# Altium PCB PCB1.PcbDoc
Units mm, origin at the board's own origin, x right, y up, seen from the top; angles counter-clockwise.
Board outline 73.68 x 78.56 mm, 2 copper layers (Top Layer, Bottom Layer); 57 components, 47 nets, 244 pads, 141 vias.
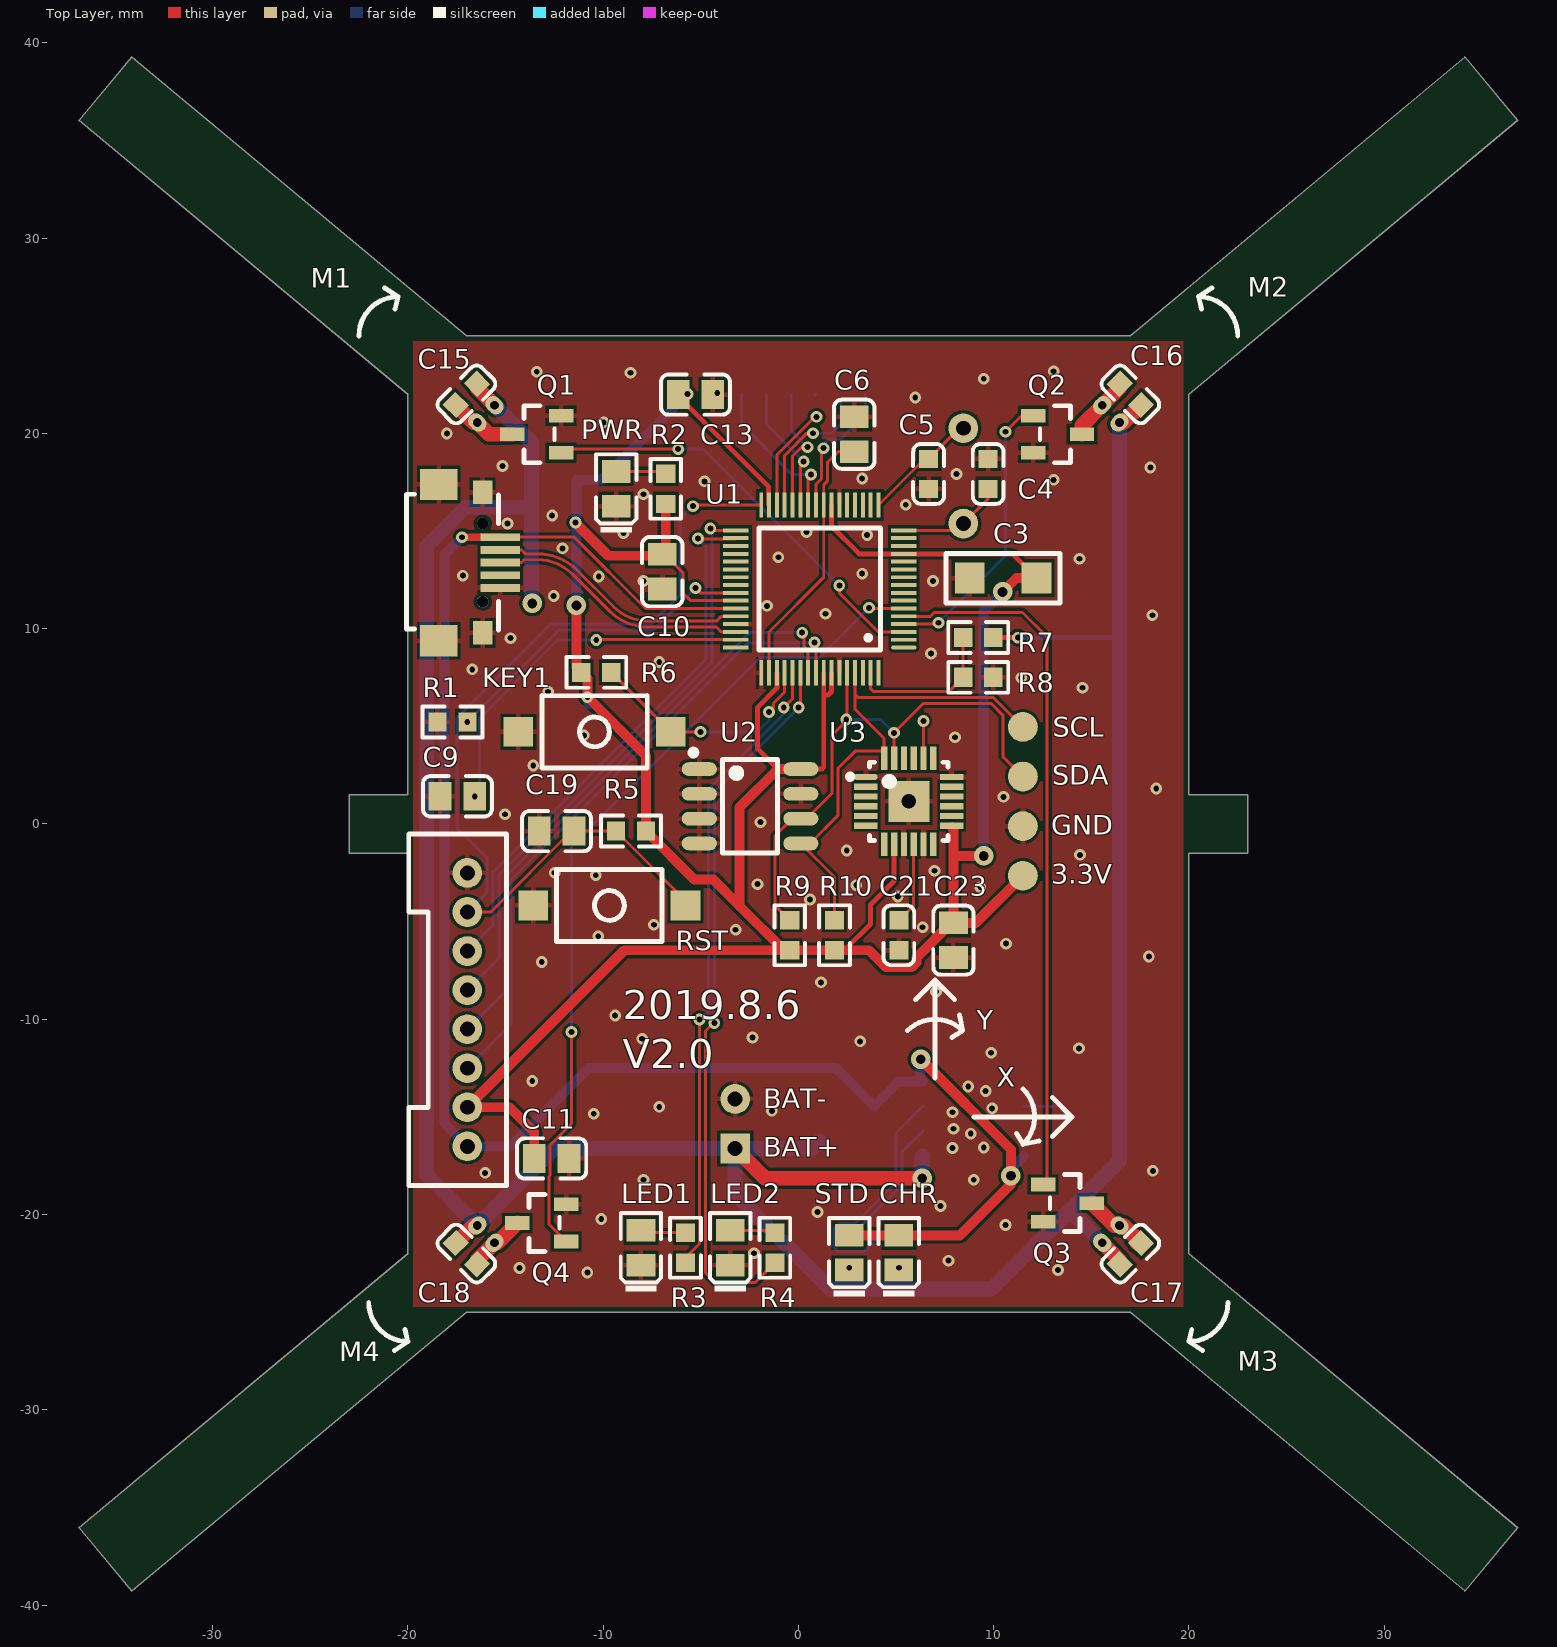
[diagram p0: Top Layer view]
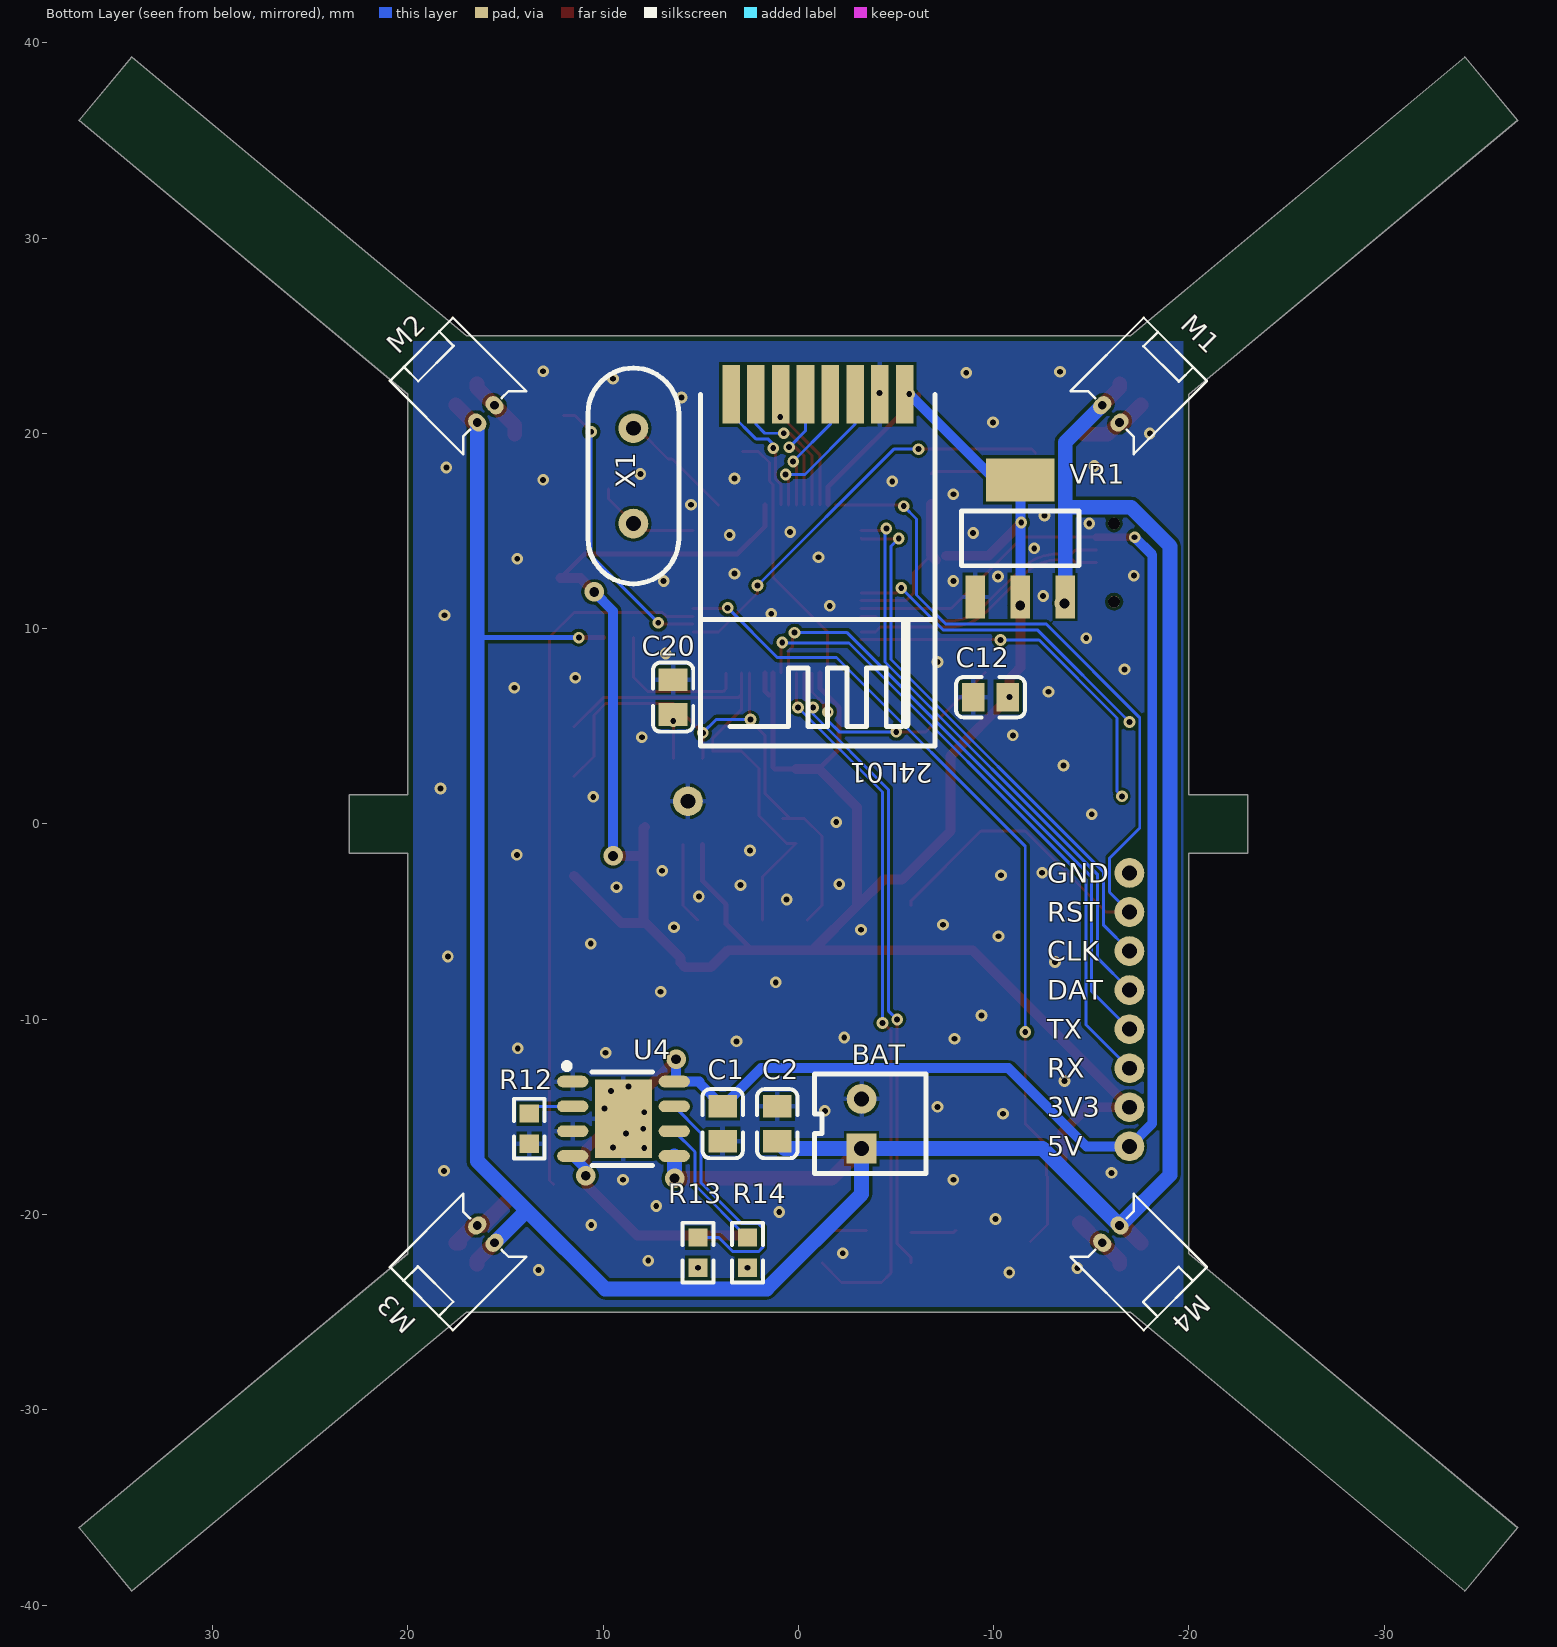
[diagram p1: Bottom Layer view, seen from below]
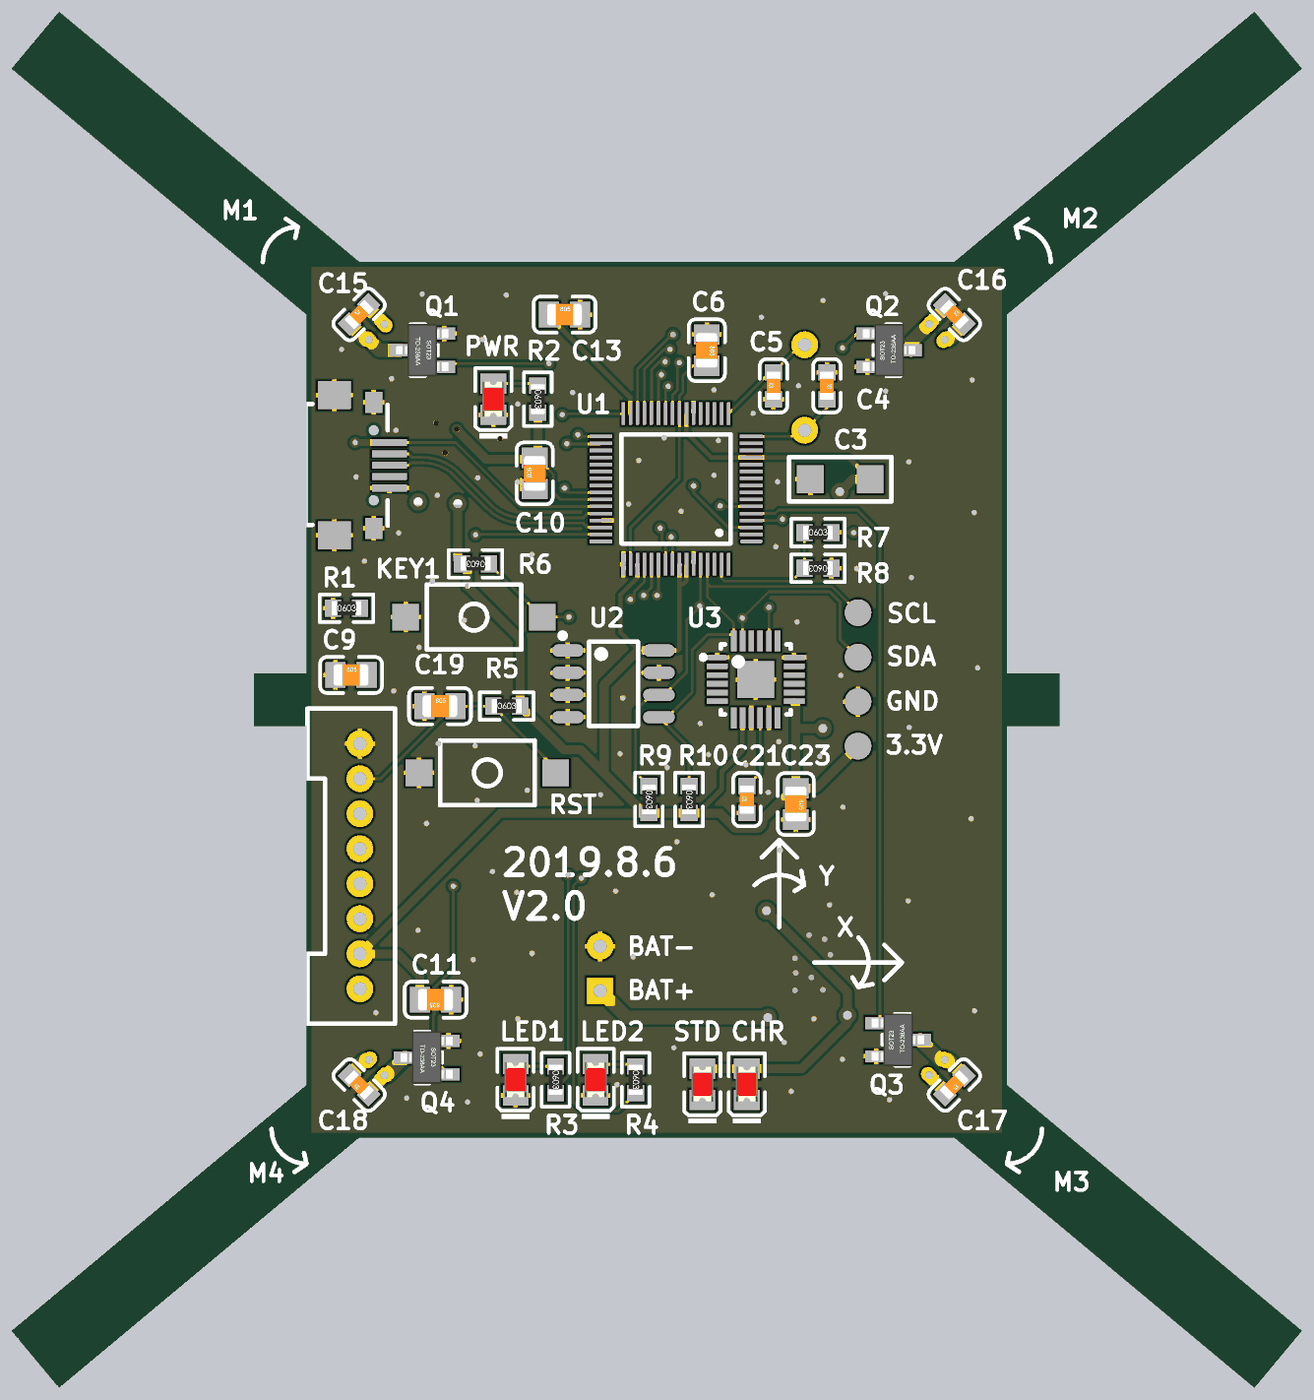
[diagram p2: 3D render of the assembled board from above, using the file's embedded part models]
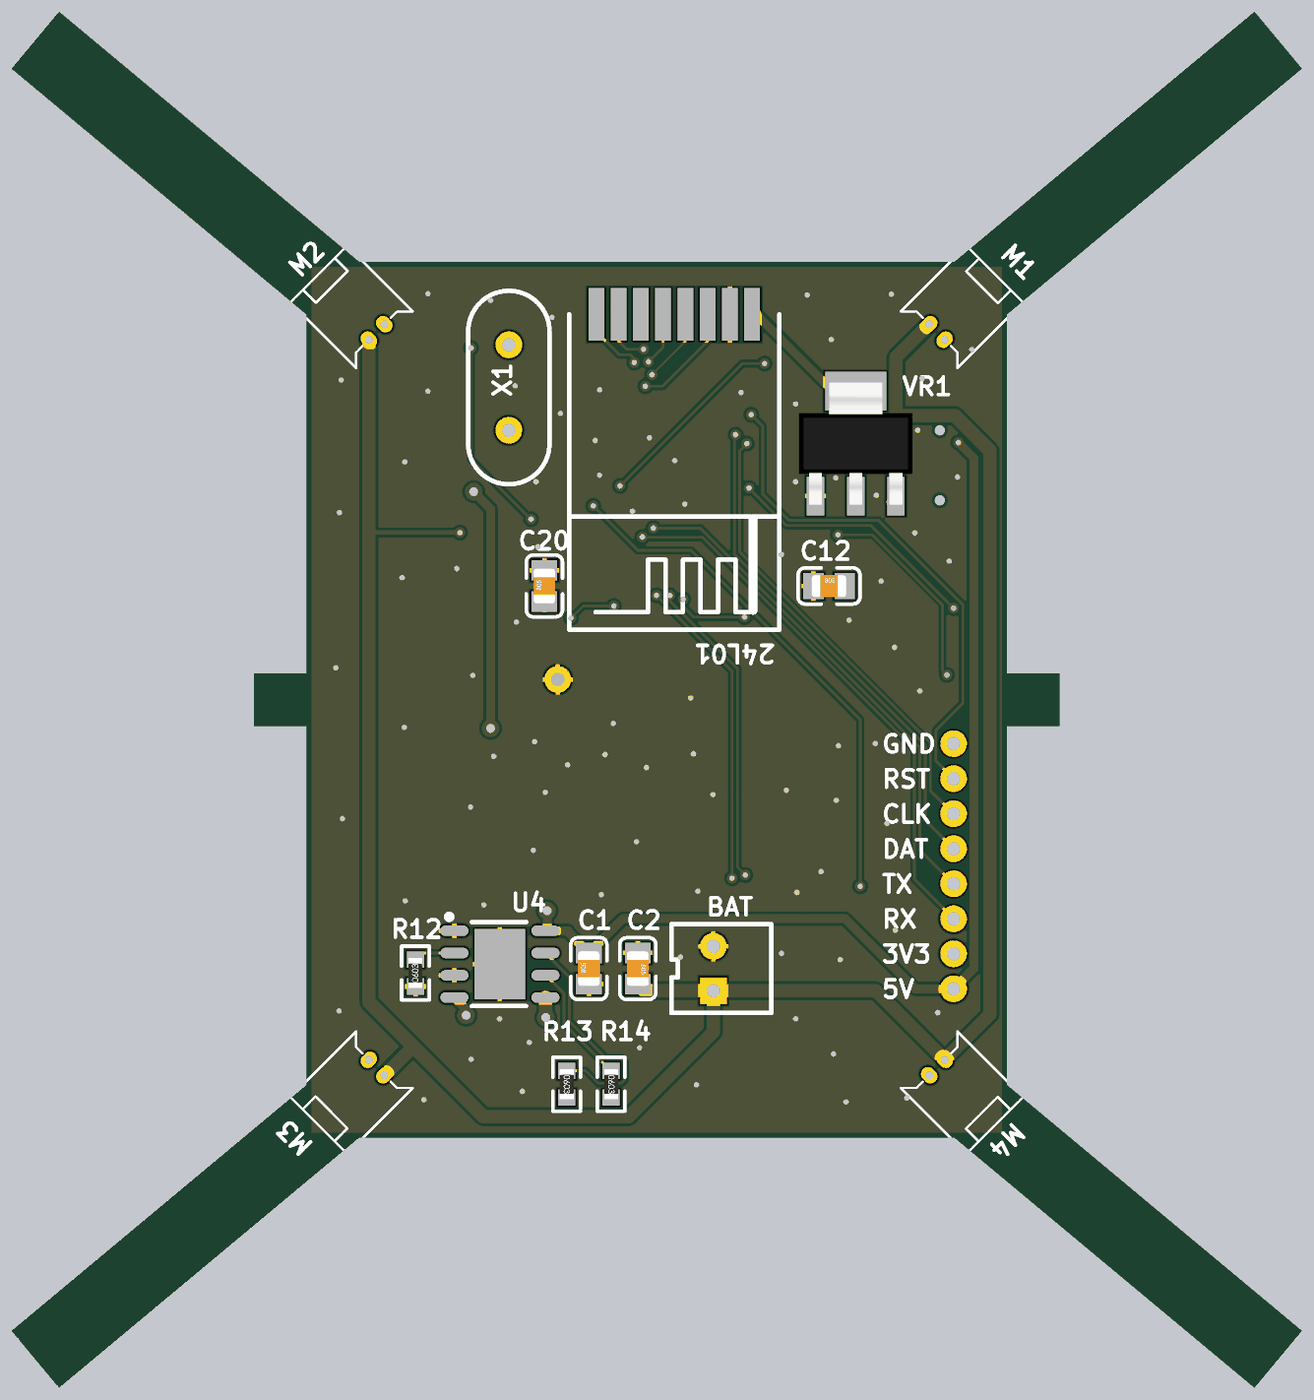
[diagram p3: 3D render of the assembled board from below, using the file's embedded part models]

## Layer stack, top to bottom
Top Layer: signal copper 0.0356
Dielectric: dielectric 0.32, FR-4, Dk 4.8
Bottom Layer: signal copper 0.0356

## Board outline
-20,22 -20,1.5 -23,1.5 -23,-1.5 -20,-1.5 -20,-22 -36.84,-36.033 -34.135,-39.279 -17,-25 17,-25 34.135,-39.279 36.84,-36.033 20,-22 20,-1.5 23,-1.5 23,1.5 20,1.5 20,22 36.84,36.033 34.135,39.279 17,25 -17,25 -34.135,39.279 -36.84,36.033

## Design rules (kind name [scope] priority, off if disabled: settings)
Clearance [All] p1: gap=0.152
ComponentClearance [All] p1: gap=0 collisioncheckmode=3 verticalgap=0 showdistances=FALSE
DiffPairsRouting [All] p1: maxlimit=0.152 minlimit=0.152 mostfreqgap=0.152 maxuncoupledlength=12.7
PolygonConnect PolygonConnect_1 [isvia] p1: connectstyle=Direct reliefconductorwidth=0.254 reliefentries=4 polygonreliefangle="90 Angle"
PolygonConnect [All] p2: connectstyle=Relief reliefconductorwidth=0.254 reliefentries=4 polygonreliefangle="90 Angle"
RoutingVias [All] p1: holewidth=0.3 width=0.6 viastyle="Through Hole" minholewidth=0.3 minwidth=0.6 maxholewidth=0.711 maxwidth=1.27
SilkscreenOverComponentPads [All] p1: minsilkscreentomaskgap=0.254
SolderMaskExpansion [All] p1: expansion=0.102
Width Width_1 [InNetClass('POWER')] p1: maxlimit=0.762 minlimit=0.152 preferedwidth=0.762 minimp=50.000000 maximp=50.000000 favimp=50.000000
Width [All] p2: maxlimit=0.152 minlimit=0.152 preferedwidth=0.152 minimp=50.000000 maximp=50.000000 favimp=50.000000
25 further rules are at their usual default settings.

## Classes and differential pairs
component class Sheet1: BAT C1 C2 C3 C4 C5 C6 C9 C10 C11 C12 C13 C15 C16 C17 C18 C19 C20 C21 C23 KEY1 LED1 LED2 M1 M2 M3 M4 PWR Q1 Q2 Q3 Q4 R1 R2 R3 R4 R5 R6 R7 R8 R9 R10 R12 R13 R14 RST U1 U2 U3 U4 VR1 X1
net class POWER: M1 M2 M3 M4 VBAT VBUS VCC33
differential pair NewDifferentialPair1: +HSUSB_D+ -HSUSB_D-

## Components (designator, comment, footprint, x,y, rotation, side; value= is the part's Value field where it differs from the comment)
24L01 "" NRF24L01 -1,22 r0 bottom
BAT "XH2.54_2P" XH_2P -3.236,-12.808 r90 bottom
C1 "10uF" LC-0805_C 3.876,-15.348 r90 bottom
C2 "10uF" LC-0805_C 1.082,-15.348 r270 bottom
C3 "47uF" 1206 10.48,12.592 r0 top
C4 "20pF" LC-0603_C 9.718,17.926 r270 top
C5 "20pF" LC-0603_C 6.67,17.926 r90 top
C6 "10uF" LC-0805_C 2.86,19.958 r270 top
C9 "1uF" LC-0805_C -17.46,1.416 r0 top
C10 "1uF" LC-0805_C -6.97,12.922 r90 top
C11 "1uF" LC-0805_C -12.634,-17.126 r180 top
C12 "1uF" LC-0805_C -9.84,6.496 r180 bottom
C13 "10uF" LC-0805_C -5.268,21.99 r0 top
C15 "104" LC-0603_C -17,22 r45 top
C16 "104" LC-0603_C 17,22 r315 top
C17 "104" LC-0603_C 17,-22 r225 top
C18 "104" LC-0603_C -17,-22 r135 top
C19 "10uF" LC-0805_C -12.38,-0.362 r0 top
C20 "10uF" LC-0805_C 6.416,6.496 r90 bottom
C21 "104" LC-0603_C 5.146,-5.696 r90 top
C23 "10uF" LC-0805_C 7.94,-5.95 r270 top
CHR "" LC-0805_LED_S1 5.146,-21.952 r90 top (schematic designator CHRG)
KEY1 "" KEY2 -6.538,4.718 r180 top
LED1 "" LC-0805_LED_S1 -8.062,-21.698 r90 top
LED2 "" LC-0805_LED_S1 -3.49,-21.698 r90 top
M1 "HEAD2" HEADER2-1.25MM -16,21 r225 bottom
M2 "HEAD2" HEADER2-1.25MM 16,21 r135 bottom
M3 "HEAD2" HEADER2-1.25MM 16,-21 r45 bottom
M4 "HEAD2" HEADER2-1.25MM -16,-21 r315 bottom
P1 "PH2.0 JTAG" "PH2.0 8P" -16.952,-9.506 r90 top
PWR "" LC-0805_LED_S1 -9.332,17.164 r90 top
Q1 "SI2302" LC-SOT-23(SOT-23-3) -13.396,19.958 r0 top
Q2 "SI2302" LC-SOT-23(SOT-23-3) 13.274,19.958 r180 top
Q3 "SI2302" LC-SOT-23(SOT-23-3) 13.782,-19.412 r180 top
Q4 "SI2302" LC-SOT-23(SOT-23-3) -13.142,-20.428 r0 top
R1 "200" LC-0603_R -17.714,5.226 r0 top
R2 "560" LC-0603_R -6.792,17.164 r270 top
R3 "560" LC-0603_R -5.776,-21.698 r270 top
R4 "560" LC-0603_R -1.204,-21.698 r270 top
R5 "10K" LC-0603_R -8.57,-0.362 r0 top
R6 "10K" LC-0603_R -10.348,7.766 r180 top
R7 "10K" LC-0603_R 9.21,9.544 r0 top
R8 "10K" LC-0603_R 9.21,7.512 r180 top
R9 "10K" LC-0603_R -0.442,-5.696 r270 top
R10 "10K" LC-0603_R 1.844,-5.696 r270 top
R12 "2K" LC-0603_R 13.782,-15.602 r90 bottom
R13 "560" LC-0603_R 5.146,-21.952 r270 bottom
R14 "560" LC-0603_R 2.606,-21.952 r270 bottom
RST "" KEY2 -5.776,-4.172 r180 top
STD "翠绿 0805" LC-0805_LED_S1 2.606,-21.952 r90 top (schematic designator STDBY)
U1 "M484SIDAE" LQFP64L 5.4,9.036 r180 top
U2 "EEPROM/AT24C256C-SSHL-T" LC-SOIC-8_150mil -2.474,0.908 r270 top
U3 "MPU6050" QFN-24_4x4x05P 5.654,1.162 r270 top
U4 "TP4056" LC-SOP-8_EP_150mil 8.956,-15.094 r270 bottom
USB "MicroUSB" MICROUSB1 -16.165,15.386 r270 top
VR1 "AMS1117-3.3" LC-SOT-223 -11.364,14.624 r270 bottom
X1 "12MHz" XTAL1 8.448,15.386 r90 bottom

## Footprints (in the part's own frame and the unit in brackets; to place one, negate y for a bottom-side part, rotate by r counter-clockwise, add the part's x,y. Pads: shape width x height; smd on the part's side, far side on the other; paste and mask are expansions set on the pad)
1206 [mm]
  rect 1.52x1.6 smd: 1(-1.71,0) 2(1.71,0)
  silkscreen extent -2.92,-1.27 2.92,1.27
HEADER2-1.25MM [mm]
  oval 0.8x1 hole 0.45: 1(-0.625,0) 2(0.625,0)
  silkscreen extent -2.29,-0.64 2.29,4.67
KEY2 [mil]
  rect 60x60 smd: 1(307.09,0) 2(0,0)
  silkscreen extent 47,-73 260,73
LC-0603_C [mm]
  rect 0.93x0.98 smd: 1(-0.77,0) 2(0.77,0)
  silkscreen extent -1.54,-0.79 1.54,0.79, body extent -0.8,-0.4 0.8,0.4, height 0.3
LC-0603_R [mm]
  rect 0.93x0.98 smd: 1(-0.77,0) 2(0.77,0)
  silkscreen extent -1.53,-0.79 1.54,0.79, body extent -0.85,-0.4 0.85,0.4, height 0.56
LC-0805_C [mm]
  rect 1.16x1.47 smd: 1(-0.89,0) 2(0.89,0)
  silkscreen extent -1.77,-1.04 1.77,1.04, body extent -1,-0.63 1,0.63, height 0.77
LC-0805_LED_S1 [mm]
  rect 1.16x1.47 smd: A(0.89,0) K(-0.89,0)
  silkscreen extent -2.24,-1.03 1.77,1.03, body extent -1.01,-0.62 1.01,0.62, height 1.1
LC-SOIC-8_150mil [mm]
  oval 0.7x1.8 smd: 1(-1.905,-2.6) 2(-0.635,-2.6) 3(0.635,-2.6) 4(1.905,-2.6) 5(1.905,2.6) 6(0.635,2.6) 7(-0.635,2.6) 8(-1.905,2.6)
  silkscreen extent -2.9,-3.05 2.4,1.4
LC-SOP-8_EP_150mil [mm]
  rect 4x2.9 smd: 0(0,0)
  oval 0.6x1.6 smd: 1(-1.905,-2.6) 2(-0.635,-2.6) 3(0.635,-2.6) 4(1.905,-2.6) 5(1.905,2.6) 6(0.635,2.6) 7(-0.635,2.6) 8(-1.905,2.6)
  silkscreen extent -2.85,-3.05 2.4,1.5
LC-SOT-23(SOT-23-3) [mm]
  rect 1.25x0.7 smd: 1(1.25,-0.95) 2(1.25,0.95) 3(-1.25,0)
  silkscreen extent -0.65,-1.46 0.9,1.46, body extent -1.5,-1.5 1.5,1.5, height 1.3
LC-SOT-223 [mm]
  rect 2.2x1 smd: 1(3,-2.3) 2(3,0) 3(3,2.3)
  rect 2.2x3.5 smd: 2(-3,0)
  silkscreen extent -1.4,-3 1.4,3, body extent -3.49,-3.24 3.49,3.24, height 1.64
LQFP64L [mm]
  oval 1.3x0.2 smd: 1(0,0)
  rect 1.3x0.2 smd: 2(0,-0.4) 3(0,-0.8) 4(0,-1.2) 5(0,-1.6) 6(0,-2) 7(0,-2.4) 8(0,-2.8) 9(0,-3.2) 10(0,-3.6) 11(0,-4) 12(0,-4.4) 13(0,-4.8) 14(0,-5.2) 15(0,-5.6) 16(0,-6) 33(8.6,-6) 34(8.6,-5.6) 35(8.6,-5.2) 36(8.6,-4.8) 37(8.6,-4.4) 38(8.6,-4) 39(8.6,-3.6) 40(8.6,-3.2) 41(8.6,-2.8) 42(8.6,-2.4) 43(8.6,-2) 44(8.6,-1.6) 45(8.6,-1.2) 46(8.6,-0.8) 47(8.6,-0.4) 48(8.6,0)
  rect 0.2x1.3 smd: 17(1.3,-7.3) 18(1.7,-7.3) 19(2.1,-7.3) 20(2.5,-7.3) 21(2.9,-7.3) 22(3.3,-7.3) 23(3.7,-7.3) 24(4.1,-7.3) 25(4.5,-7.3) 26(4.9,-7.3) 27(5.3,-7.3) 28(5.7,-7.3) 29(6.1,-7.3) 30(6.5,-7.3) 31(6.9,-7.3) 32(7.3,-7.3) 49(7.3,1.3) 50(6.9,1.3) 51(6.5,1.3) 52(6.1,1.3) 53(5.7,1.3) 54(5.3,1.3) 55(4.9,1.3) 56(4.5,1.3) 57(4.1,1.3) 58(3.7,1.3) 59(3.3,1.3) 60(2.9,1.3) 61(2.5,1.3) 62(2.1,1.3) 63(1.7,1.3) 64(1.3,1.3)
  silkscreen extent 1.19,-6.11 7.41,0.12
MICROUSB1 [mm]
  round 0.6 hole 0.6 unplated: 0(0,0) 0(4,0)
  rect 0.4x2 smd: 1(0.7,0.9) 2(1.35,0.9) 3(2,0.9) 4(2.65,0.9) 5(3.3,0.9)
  rect 1.6x1.9 smd: 5(-2,-2.25) 5(6,-2.25)
  rect 1.2x1 smd: 5(-1.6,0) 5(5.6,0)
  silkscreen extent -1.5,-3.9 5.45,0.8
NRF24L01 [mm]
  rect 0.9x3 smd: 1(-4.445,0) 2(-3.175,0) 3(-1.905,0) 4(-0.635,0) 5(0.635,0) 6(1.905,0) 7(3.175,0) 8(4.445,0)
  silkscreen extent -6,0 6,18
"PH2.0 8P" [mil]
  round 60 hole 30: 1(-275.59,0) 2(-196.85,0) 3(-118.11,0) 4(-39.37,0) 5(39.37,0) 6(118.11,0) 7(196.85,0) 8(275.59,0)
  silkscreen extent -354,-79 354,118
QFN-24_4x4x05P [mm]
  oval 0.32x1.2 smd: 1(-1.25,-2.2)
  rect 0.32x1.2 smd: 2(-0.75,-2.2) 3(-0.25,-2.2) 4(0.25,-2.2) 5(0.75,-2.2) 6(1.25,-2.2) 13(1.25,2.2) 14(0.75,2.2) 15(0.25,2.2) 16(-0.25,2.2) 17(-0.75,2.2) 18(-1.25,2.2)
  rect 1.2x0.32 smd: 7(2.2,-1.25) 8(2.2,-0.75) 9(2.2,-0.25) 10(2.2,0.25) 11(2.2,0.75) 12(2.2,1.25) 19(-2.2,1.25) 20(-2.2,0.75) 21(-2.2,0.25) 22(-2.2,-0.25) 23(-2.2,-0.75) 24(-2.2,-1.25)
  rect 2.1x2.1 smd: 25(0,0)
  silkscreen extent -2,-3.01 2,2
XH_2P [mil]
  rect 60x60 hole 30: 1(-150,0)
  round 60 hole 30: 2(-50,0)
  silkscreen extent -200,-130 0,94
XTAL1 [mil]
  round 60 hole 30: 1(0,0) 2(192.13,0)
  silkscreen extent -121,-92 314,92

## Part data
24L01: library part NRF24L01
C1 C2 C6 C9 C10 C11 C12 C13 C19 C20 C23: library part "0805 1.5nF (152) 10% 50V", "ÌùÆ"
C3: library part Capacitor
C4 C5 C15 C16 C17 C18 C21: library part "0603 6pF (6R0) 0.25pF 50V", "ÌùÆ"
CHR LED2: library part "0805 红灯"
KEY1 RST: library part KEY
LED1: library part "0805 蓝灯"
PWR: library part "0805 黄灯"
Q1 Q2 Q3 Q4: library part "2N7002 7002", "MOS(³¡Ð"
R1 R2 R3 R4 R5 R6 R7 R8 R9 R10 R12 R13 R14: library part "0603 2.4KΩ (2401) 1%", "Ì"
STD: library part "0805 翠绿"
U2: "EEPROM"
U4: "电池"
VR1: library part "SOT-223 AMS1117-3.3", "µÍÑ¹²"
X1: library part XTAL

## Free pads (board coordinates)
  round 1.524 smd: 0(11.496,-2.648) 0(11.496,-0.108) 0(11.496,2.432) 0(11.496,4.972)
  round 1.524 hole 0.762: 2(5.654,1.162)

## Via types
v1: diameter 0.6, hole 0.3, Top Layer to Bottom Layer, tented both sides, 134 vias
v2: diameter 1, hole 0.5, Top Layer to Bottom Layer, tented both sides, 7 vias

## Nets (pads, with @x,y where several pads share a name; then routed paths per layer and width w, separated by ;. In a path a pad name is that pad's centre, name@x,y a point inside that pad or via, vN(x,y) a via of type N, cw(c..) or ccw(c..) an arc to the next point about the centre after c; other vN are vias at no path point)
24L01_CE: 24L01.3 U1.26 | length 7.8
  Top Layer w0.152: U1.26 0.5,17.75 v1(0.65,17.901)
  Bottom Layer w0.152: 24L01.3 -2.905,20.465 -0.34,17.901 v1(0.65,17.901)
24L01_IRQ: 24L01.8 U1.25 | length 7.1
  Top Layer w0.152: U1.25 0.9,17.403 1.179,17.682 1.179,19.14 v1(1.285,19.247)
  Bottom Layer w0.152: v1(1.285,19.247) 1.285,19.45 1.539,19.704 2.152,19.704 3.445,20.997 24L01.8
ADC0_CH8: R7.1 R8.2 U1.63 | length 7.9
  Top Layer w0.152: U1.63 3.7,6.926 3.851,6.775 7.703,6.775 R8.2 R7.1
CHRG: R13.1 U4.7 | length 13.3
  Bottom Layer w0.152: R13.1 4.062,-21.182 3.343,-21.901 2.047,-21.901 1.819,-21.673 1.819,-20.691 2.056,-20.453 2.904,-20.453 4.994,-18.363 4.994,-15.821 U4.7
EPWM0_CH1: Q1.1 U1.3 | length 21.7
  Top Layer w0.152: Q1.1 -11.958,19.196 v1(-6.157,19.196) ; v1(2.098,12.211) 2.098,11.83 4.092,9.836 U1.3
  Bottom Layer w0.152: v1(-6.157,19.196) -4.887,19.196 v1(2.098,12.211)
EPWM0_CH2: Q2.1 U1.4 | length 14.8
  Top Layer w0.152: U1.4 7.108,10.236 v1(7.178,10.306) ; v1(10.607,20.085) 11.43,20.908 Q2.1
  Bottom Layer w0.152: v1(7.178,10.306) 10.607,13.735 v1(10.607,20.085)
EPWM0_CH3: Q3.1 U1.5 | length 36.1
  Top Layer w0.152: U1.5 6.76,10.636 6.959,10.835 11.475,10.835 12.741,9.569 12.741,-18.253 Q3.1
EPWM0_CH4: Q4.1 U1.6 | length 43.2
  Top Layer w0.152: Q4.1 -12.761,-20.509 -12.761,-18.047 -12.715,-18.001 -12.715,-16.445 -11.618,-15.348 v1(-11.618,-10.649) ; v1(3.622,11.068) 3.654,11.036 U1.6
  Bottom Layer w0.152: v1(-11.618,-10.649) -11.618,-1.138 -1.952,8.528 1.082,8.528 v1(3.622,11.068)
GND: 24L01.2 BAT.2 C1.1 C2.1 C3.1 C4.1 C5.1 C6.1 C9.1 C10.1 C11.1 C12.1 C13.2 C19.1 C20.2 C21.1 C23.2 KEY1.1 LED1.K LED2.K P1.8 pad.0@11.496,-0.108 pad.2 PWR.K Q1.2 Q2.2 Q3.2 Q4.2 R1.1 R8.1 R12.1 RST.1 U1.22 U1.45 U1.49 U1.59 U2.1 U2.2 U2.3 U2.4 U2.7 U3.1 U3.9 U3.11 U3.18 U3.25 U4.0 U4.1 U4.3 USB.5 VR1.1
  other v1: -10.805,-22.968 13.299,-22.841 -14.285,-22.739 7.686,-22.358 -2.271,-21.977 10.607,-20.53 -10.094,-20.225 0.98,-19.869 7.28,-19.564 -7.935,-18.218 8.981,-18.218 -16.038,-17.863 18.151,-17.761 7.889,-16.593 9.489,-16.567 8.829,-15.856 7.94,-15.602 -10.475,-14.84 7.889,-14.764 -1.356,-14.688 9.921,-14.561 -7.122,-14.484 9.591,-13.672 8.702,-13.443 -13.625,-13.164 9.87,-11.716 14.366,-11.487 3.165,-11.132 -8,-11 -2.347,-10.928 -9.383,-9.811 7.051,-8.592 1.158,-8.109 -13.142,-7.068 17.948,-6.788 10.632,-6.128 -10.246,-5.747 -3.211,-5.417 6.365,-5.29 -7.402,-5.163 0.599,-3.867 5.095,-3.715 9.312,-3.232 2.962,-3.131 -2.093,-3.08 -10.373,-2.623 -12.482,-2.496 6.975,-2.394 14.417,-1.581 2.479,-1.353 -1.941,0.095 -15.022,0.502 10.505,1.391 18.329,1.822 -13.574,2.991 8.016,4.439 -10.983,4.54 -12.812,6.775 14.544,6.979 11.42,7.487 -16.698,7.918 -7.122,8.299 6.797,8.731 -14.742,9.519 18.125,10.687 1.387,10.763 -1.61,11.17 -12.532,11.678 -7.935,12.44 6.899,12.44 -10.221,12.668 -17.181,12.719 3.266,12.821 14.392,13.583 -1.026,13.659 -12.075,14.116 3.52,14.802 -8.951,14.903 0.422,14.954 -14.895,15.386 -12.609,15.792 5.502,16.351 -7.935,16.885 -4.811,17.545 13.071,17.621 3.266,17.697 8.092,17.926 18.024,18.256 -15.149,18.332 -18,20 -9.967,20.568 5.984,21.838 -4.15,22.066 9.489,22.803 -8.595,23.108 -13.396,23.158 13.071,23.184
HSUSB_D+: U1.46 USB.3 | length 13.4
  Top Layer w0.152: USB.3 -14.183,13.386 -14.038,13.532 -13.355,13.532 cw(c-13.355,10.992) -11.559,12.788 -9.688,10.917 ccw(c-7.676,12.928) -7.676,10.084 -4.195,10.084 -3.947,9.836 U1.46
HSUSB_D-: U1.44 USB.2 | length 13.4
  Top Layer w0.152: USB.2 -14.183,14.036 -13.984,13.837 -13.355,13.837 cw(c-13.355,10.992) -11.344,13.003 -9.473,11.132 ccw(c-7.676,12.928) -7.676,10.388 -4.195,10.388 -3.947,10.636 U1.44
HSUSB_ID: U1.48
HSUSB_VRES: R1.2 U1.41 | length 16.7
  Top Layer w0.152: v1(-5.268,12.084) -5.02,11.836 U1.41
  Bottom Layer w0.152: v1(-16.952,5.226) -12.232,9.946 -7.406,9.946 v1(-5.268,12.084)
I2C1_SCL: pad.0@11.496,2.432 R9.1 U1.60 U2.6 U3.23 | length 29.4
  Top Layer w0.152: R9.1 -1.204,-4.164 -1.204,-0.616 -0.315,0.273 U2.6 U2.6@0.803,0.273 ; U2.6@0.422,0.273 1.717,1.568 1.717,4.54 2.5,5.323 U1.60 ; U3.23 4.892,3.374 v1(4.892,4.667) 6.391,6.166 9.871,6.166 10.468,5.569 10.468,3.46 pad.0@11.496,2.432
  Bottom Layer w0.152: v1(2.454,5.353) 4.206,5.353 v1(4.892,4.667)
I2C1_SDA: pad.0@11.496,4.972 R10.1 U1.61 U2.5 U3.24 | length 26.2
  Top Layer w0.152: R10.1 1.844,-2.715 U2.5 0.599,-0.997 2.022,0.425 2.022,2.838 2.911,3.727 4.384,3.727 4.384,4.388 2.9,5.872 2.9,6.648 ; U1.61 2.9,6.648 ; pad.0@11.496,4.972 9.997,6.471 3.078,6.471 2.9,6.648
ICE_CLK: P1.6 U1.34 | length 28.3
  Top Layer w0.152: v1(-5.141,14.624) -5.12,14.603 -3.233,14.603 U1.34
  Bottom Layer w0.152: P1.6 -15.631,-5.185 -15.631,-2.47 -4.739,8.422 -4.739,14.222 v1(-5.141,14.624)
ICE_DAT: P1.5 U1.33 | length 30.2
  Top Layer w0.152: v1(-4.506,15.132) -4.41,15.036 U1.33
  Bottom Layer w0.152: P1.5 -15.326,-6.88 -15.326,-2.596 -4.435,8.295 -4.435,15.061 v1(-4.506,15.132)
KEY1: KEY1.2 R6.1 U1.52 | length 12.3
  Top Layer w0.152: R6.1 -6.538,4.726 KEY1.2 v1(-5.014,4.718) ; v1(-1.509,5.734) -1.275,5.967 -1.275,6.182 -0.7,6.757 U1.52
  Bottom Layer w0.152: v1(-5.014,4.718) -2.092,4.718 -1.509,5.301 v1(-1.509,5.734)
LDO_CAP: C6.2 U1.24 U1.50 | length 13.6
  Top Layer w0.152: U1.50 -1.5,9.832 1.3,12.632 U1.24 1.3,17.372 1.484,17.555 1.484,18.505 2.046,19.068 C6.2
LED1: R3.2 U1.53 | length 32.5
  Top Layer w0.152: R3.2 -5.776,-22.206 -5.057,-21.488 v1(-5.057,-10.007) ; v1(-0.747,5.963) -0.3,6.409 U1.53
  Bottom Layer w0.152: v1(-5.057,-10.007) -4.608,-9.557 -4.608,1.772 -0.747,5.632 v1(-0.747,5.963)
LED2: R4.2 U1.54 | length 36.9
  Top Layer w0.152: v1@-4.379,-10.192 -4.379,-10.225 -4.753,-10.598 -4.753,-22.975 -4.252,-23.476 -2.212,-23.476 R4.2 ; v1(0.015,5.963) 0.1,6.047 U1.54
  Bottom Layer w0.152: v1(-4.303,-10.192) -4.303,1.645 v1(0.015,5.963)
M1: C15.1 M1.2 Q1.3 | length 3.5
  Top Layer w0.762: C15.1 -16.647,20.558 M1.2 -15.842,19.958 Q1.3
M2: C16.1 M2.2 Q2.3 | length 3.4
  Top Layer w0.762: Q2.3 14.524,20.408 M2.2 16.456,22.339 C16.1
M3: C17.1 M3.2 Q3.3 | length 3.6
  Top Layer w0.762: Q3.3 16.178,-20.558 M3.2 16.647,-20.558 C17.1 C17.1@17.339,-21.456
M4: C18.1 M4.2 Q4.3 | length 3.1
  Top Layer w0.762: C18.1 -16.456,-22.339 M4.2 -15.406,-21.442 Q4.3
NetC20_1: C20.1 U3.20 | length 1.9
  Top Layer w0.152: U3.20 v1(6.404,5.277)
NetC21_2: C21.2 U3.10 | length 4.2
  Top Layer w0.152: C21.2 5.904,-4.168 U3.10
NetCHRG_K: CHR.K R13.2
  other v1: 5.146,-22.722
NetLED1_A: LED1.A R3.1 | length 2.3
  Top Layer w0.152: LED1.A -7.942,-20.928 R3.1
NetLED2_A: LED2.A R4.1 | length 2.3
  Top Layer w0.152: LED2.A -1.324,-20.808 R4.1
NetPWR_A: PWR.A R2.1 | length 2.6
  Top Layer w0.152: PWR.A -6.912,18.054 R2.1
NetR12_2: R12.2 U4.2 | length 2.4
  Bottom Layer w0.152: U4.2 13.409,-14.459 R12.2
NetR14_2: R14.2 STD.K
  other v1: 2.606,-22.722
RST: C19.2 P1.7 R5.1 RST.2 U1.32 | length 48
  Top Layer w0.152: P1.7 -15.757,-4.506 -11.613,-0.362 C19.2 R5.1 -5.776,-3.926 RST.2 ; v1(-5.395,16.275) -5.334,16.336 U1.32
  Bottom Layer w0.152: P1.7 -15.936,-3.49 -15.936,-1.749 -17.481,-0.205 -17.481,5.445 -12.675,10.25 -7.533,10.25 -6.055,11.728 -6.055,15.615 v1(-5.395,16.275)
SPI0_CLK: 24L01.5 U1.28 | length 6.5
  Top Layer w0.152: U1.28 -0.3,18.842 0.155,19.298 v1(0.472,19.298)
  Bottom Layer w0.152: 24L01.5 -0.365,20.135 v1(0.472,19.298)
SPI0_MISO: 24L01.7 U1.29 | length 7.2
  Top Layer w0.152: U1.29 -0.7,18.873 0.435,20.009 v1(0.752,20.009)
  Bottom Layer w0.152: v1(0.752,20.009) 1.718,20.009 2.175,20.466 24L01.7@2.175,21.634
SPI0_MOSI: 24L01.6 U1.30 | length 5.5
  Top Layer w0.152: U1.30 -1.1,18.905 0.842,20.847 v1(0.93,20.847)
  Bottom Layer w0.152: 24L01.6@0.828,21.923 24L01.6
SPI0_SS: 24L01.4 U1.27 | length 6.5
  Top Layer w0.152: U1.27 0.1,18.392 v1(0.269,18.561)
  Bottom Layer w0.152: 24L01.4 -1.635,20.465 v1(0.269,18.561)
STDBY: R14.1 U4.6 | length 7
  Bottom Layer w0.152: R14.1 5.298,-18.49 5.298,-16.787 U4.6
UART0_RX: P1.3 U1.56 | length 32.7
  Top Layer w0.152: v1(0.828,9.29) 0.9,9.218 U1.56
  Bottom Layer w0.152: P1.3 -14.717,-10.271 -14.717,-2.849 -2.598,9.269 0.807,9.269 v1(0.828,9.29)
UART0_TX: P1.4 U1.55 | length 31.2
  Top Layer w0.152: v1(0.193,9.798) 0.299,9.692 0.299,9.071 0.5,8.87 U1.55
  Bottom Layer w0.152: P1.4 -15.022,-8.576 -15.022,-2.723 -2.501,9.798 v1(0.193,9.798)
USB_CAP: C9.2 U1.47 | length 18.9
  Top Layer w0.152: v1(-10.348,9.417) -10.329,9.436 U1.47
  Bottom Layer w0.152: v1(-16.571,1.416) -16.317,1.67 -16.317,5.43 -12.33,9.417 v1(-10.348,9.417)
VBAT: BAT.1 C2.2 C15.2 C16.2 C17.2 C18.2 M1.1 M2.1 M3.1 M4.1 R7.2 U4.5 VR1.3 | length 162.6
  Top Layer w0.254: R7.2 v1(11.242,9.544)
  Top Layer w0.762: C18.2 -16.647,-20.558 M4.1 ; C15.2 -16.456,22.339 M1.1 ; BAT.1 -1.712,-18.142 v2(6.34,-18.142) ; M3.1 16.456,-22.339 C17.2 ; M2.1 16.647,20.558 C16.2
  Bottom Layer w0.254: v1(11.242,9.544) 16.442,9.544
  Bottom Layer w0.762: M1.1 -13.664,19.548 VR1.3 ; -13.664,16.219 -17.033,16.219 -19.035,14.218 -19.035,-17.965 M4.1 -12.502,-16.618 BAT.1 ; C2.2 0.702,-16.618 BAT.1 ; v2(6.34,-18.142) 6.34,-17.015 U4.5 ; M3.1 13.909,-19.793 ; M2.1 16.442,9.544 16.442,-17.26 13.909,-19.793 ; BAT.1 -3.236,-18.955 1.615,-23.806 9.896,-23.806 13.909,-19.793
  other v2: -13.625,11.297
VBUS: C1.2 CHR.A P1.1 STD.A U1.43 U4.4 U4.8 USB.1 | length 94.1
  Top Layer w0.152: USB.1 -11.477,14.686 -7.827,11.036 U1.43
  Top Layer w0.384: v1(-17.22,14.686) USB.1
  Top Layer w0.508: STD.A CHR.A 8.271,-21.062 10.886,-18.447 v2(10.886,-18.015) 10.886,-16.669 v2(6.264,-12.046)
  Bottom Layer w0.508: v1(-17.22,14.686) -18.12,13.786 -18.12,-15.338 P1.1 -14.757,-16.506 -10.754,-12.503 1.921,-12.503 C1.2 5.07,-13.264 5.07,-13.189 U4.8 6.264,-13.097 v2(6.264,-12.046) ; v2(10.886,-18.015) 10.886,-17.669 U4.4
VCC33: 24L01.1 C3.2 C10.2 C11.2 C12.2 C13.1 C23.1 P1.2 pad.0@11.496,-2.648 R2.2 R5.2 R6.2 R9.2 R10.2 U1.13 U1.23 U1.31 U1.42 U1.51 U1.57 U1.58 U2.8 U3.8 U3.13 VR1.2 | length 160.6
  Top Layer w0.152: C10.2@-6.792,13.76 -5.903,12.871 -5.903,11.83 -5.509,11.436 U1.42
  Top Layer w0.254: C10.2@-7.047,13.505 C10.2@-7.047,13.736 ; C13.1 -6.158,21.903 -1.521,17.265 U1.31@-1.521,16.357 ; U1.51 -1.1,6.962 -2.088,5.974 -2.088,3.85 -1.052,2.813 ; U2.8 1.209,2.813 1.3,2.904 1.3,6.598 ; U1.57 1.3,6.598 ; U1.58 1.7,6.784 1.514,6.598 1.3,6.598 ; U1.23 1.7,15.251 3.115,13.836 U1.13 10.946,13.836 C3.2 ; 2.352,-6.466 3.698,-5.12 3.698,-4.121 4.904,-2.915 U3.8
  Top Layer w0.508: C11.2 -13.524,-15.779 -14.797,-14.506 P1.2 -8.912,-6.466 R9.2@-0.739,-6.466 ; v1@-11.428,15.424 -9.739,13.736 C10.2@-7.554,13.736 ; v2(-11.364,11.195) -11.364,8.012 R6.2 -10.805,7.453 v1(-10.805,6.496) -7.8,3.491 R5.2 -5.311,-2.851 -4.354,-2.851 -3.007,-4.197 ; C10.2@-7.047,13.505 -6.792,13.76 R2.2 ; U2.8 -1.052,2.813 -3.007,0.857 -3.007,-4.197 ; U3.13@7.854,-0.154 7.94,-0.24 7.94,-1.632 ; v2@9.667,-1.81 v2(9.489,-1.632) 7.94,-1.632 ; v2(10.455,11.881) 11.166,12.592 C3.2 ; pad.0@11.496,-2.648 9.084,-5.06 C23.1 ; -3.007,-4.197 R9.2@-0.739,-6.466 ; R9.2@-0.739,-6.466 R9.2 R10.2 2.352,-6.466 3.616,-6.466 4.488,-7.337 5.804,-7.337 6.042,-7.099 6.042,-6.848 7.83,-5.06 C23.1 ; C23.1 7.94,-1.632
  Bottom Layer w0.508: VR1.2@-11.364,11.624 -11.364,17.624 -10.066,17.624 v1(-5.674,22.015) ; C12.2@-10.73,6.148 C12.2 ; v2(9.489,-1.632) 9.489,10.916 v2(10.455,11.881)
  other v1: -11.415,15.437
X12_IN: C4.2 U1.16 X1.1 | length 5.5
  Top Layer w0.152: U1.16 8.098,15.036 X1.1 9.718,16.656 C4.2
X12_OUT: C5.2 U1.17 X1.2 | length 6
  Top Layer w0.152: U1.17 6.46,18.696 C5.2 8.24,20.266 X1.2
pads on no net: U1.1 U1.2 U1.7 U1.8 U1.9 U1.10 U1.11 U1.12 U1.14 U1.15 U1.18 U1.19 U1.20 U1.21 U1.35 U1.36 U1.37 U1.38 U1.39 U1.40 U1.62 U1.64 U3.2 U3.3 U3.4 U3.5 U3.6 U3.7 U3.12 U3.14 U3.15 U3.16 U3.17 U3.19 U3.21 U3.22 USB.0 USB.4

## Polygon pours and split planes (outlines as drawn)
GND on Top Layer "Bottom Layer-No Net" (solid, remove dead copper, pour order 2): -20,25 -20,-25 20,-25 20,25
GND on Bottom Layer "Bottom Layer-No Net" (solid, remove dead copper, pour order 4): -20,25 -20,-25 20,-25 20,25

## Silkscreen, mask and mechanical layers (free items; w line width, h text height)
Top Overlay:
  lines w0.254: -22.5,25 cw(c-20.5,25) -20.5,27 ; -22,-24.5 ccw(c-20,-24.5) -20,-26.5 ; -20.644,26.38 -20.5,27 ; -20.144,-25.88 -20,-26.5 ; 5.586,-10.586 cw(c7,-12) 8.414,-10.586 ; 6,-9 7,-8 ; 7,-13 7,-8 ; 7.874,-10.922 8.414,-10.586 ; 8,-9 7,-8 ; 9,-15 14,-15 ; 11.176,-15.86 11.512,-16.4 ; 11.512,-13.572 cw(c10.098,-14.986) 11.512,-16.4 ; 13,-16 14,-15 ; 13,-14 14,-15 ; 20.144,-25.88 20,-26.5 ; 20.644,26.38 20.5,27 ; 22,-24.5 cw(c20,-24.5) 20,-26.5 ; 22.5,25 ccw(c20.5,25) 20.5,27 ; -20.5,27 -21.183,27.458 -20.5,27 ; -20,-26.5 -20.683,-26.958 -20,-26.5 ; 8.414,-10.586 8.255,-9.779 8.414,-10.586 ; 11.512,-16.4 12.319,-16.241 11.512,-16.4 ; 20,-26.5 20.683,-26.958 20,-26.5 ; 20.5,27 21.183,27.458 20.5,27
  text "M1" at -24.98,27.464 h1
  text "M2" at 23,27 h1
  text "SCL" at 13.02,4.464 h1
  text "SDA" at 13,2 h1
  text "GND" at 12.95,-0.55 h1
  text "3.3V" at 12.95,-3.05 h1
  text "2019.8.6" at -9,-10 h1.5
  text "Y" at 9.144,-10.541 h1
  text "V2.0" at -9,-12.5 h1.5
  text "X" at 10.16,-13.462 h1
  text "BAT-" at -1.8,-14.55 h1
  text "BAT+" at -1.8,-17.05 h1
  text "M4" at -23.5,-27.5 h1
  text "M3" at 22.5,-28 h1
Bottom Overlay:
  text "GND" at -12.75,-3 h1
  text "RST" at -12.75,-5 h1
  text "CLK" at -12.75,-7 h1
  text "DAT" at -12.75,-9 h1
  text "TX" at -12.75,-11 h1
  text "RX" at -12.75,-13 h1
  text "3V3" at -12.75,-15 h1
  text "5V" at -12.75,-17 h1
Mechanical 1:
  circle w0.254: c21.5,0 r0.5
  circle w0.254: c-21.5,0 r0.5
  circle w0.254: c-30.877,33.817 r0.5
  circle w0.254: c-26.267,29.976 r0.5
  circle w0.254: c30.877,33.817 r0.5
  circle w0.254: c26.267,29.976 r0.5
  circle w0.254: c30.877,-33.817 r0.5
  circle w0.254: c26.268,-29.976 r0.5
  circle w0.254: c-30.877,-33.817 r0.5
  circle w0.254: c-26.268,-29.976 r0.5
  lines w0.254: -36.84,-36.033 -34.135,-39.279 -17,-25 17,-25 34.135,-39.279 36.84,-36.033 20,-22 20,-1.5 23,-1.5 23,1.5 20,1.5 20,22 36.84,36.033 34.135,39.279 17,25 -17,25 -34.135,39.279 -36.84,36.033 -20,22 -20,1.5 -23,1.5 -23,-1.5 -20,-1.5 -20,-22 -36.84,-36.033